# Altium PCB 3043-1-1532.PcbDoc (part 1 of 2)
Units mm, origin at the board's own origin, x right, y up, seen from the top; angles counter-clockwise.
Board outline 82.5 x 82.18 mm, 4 copper layers (Top Layer, Mid-Layer 1, Mid-Layer 2, Bottom Layer); 175 components, 111 nets, 527 pads, 268 vias.
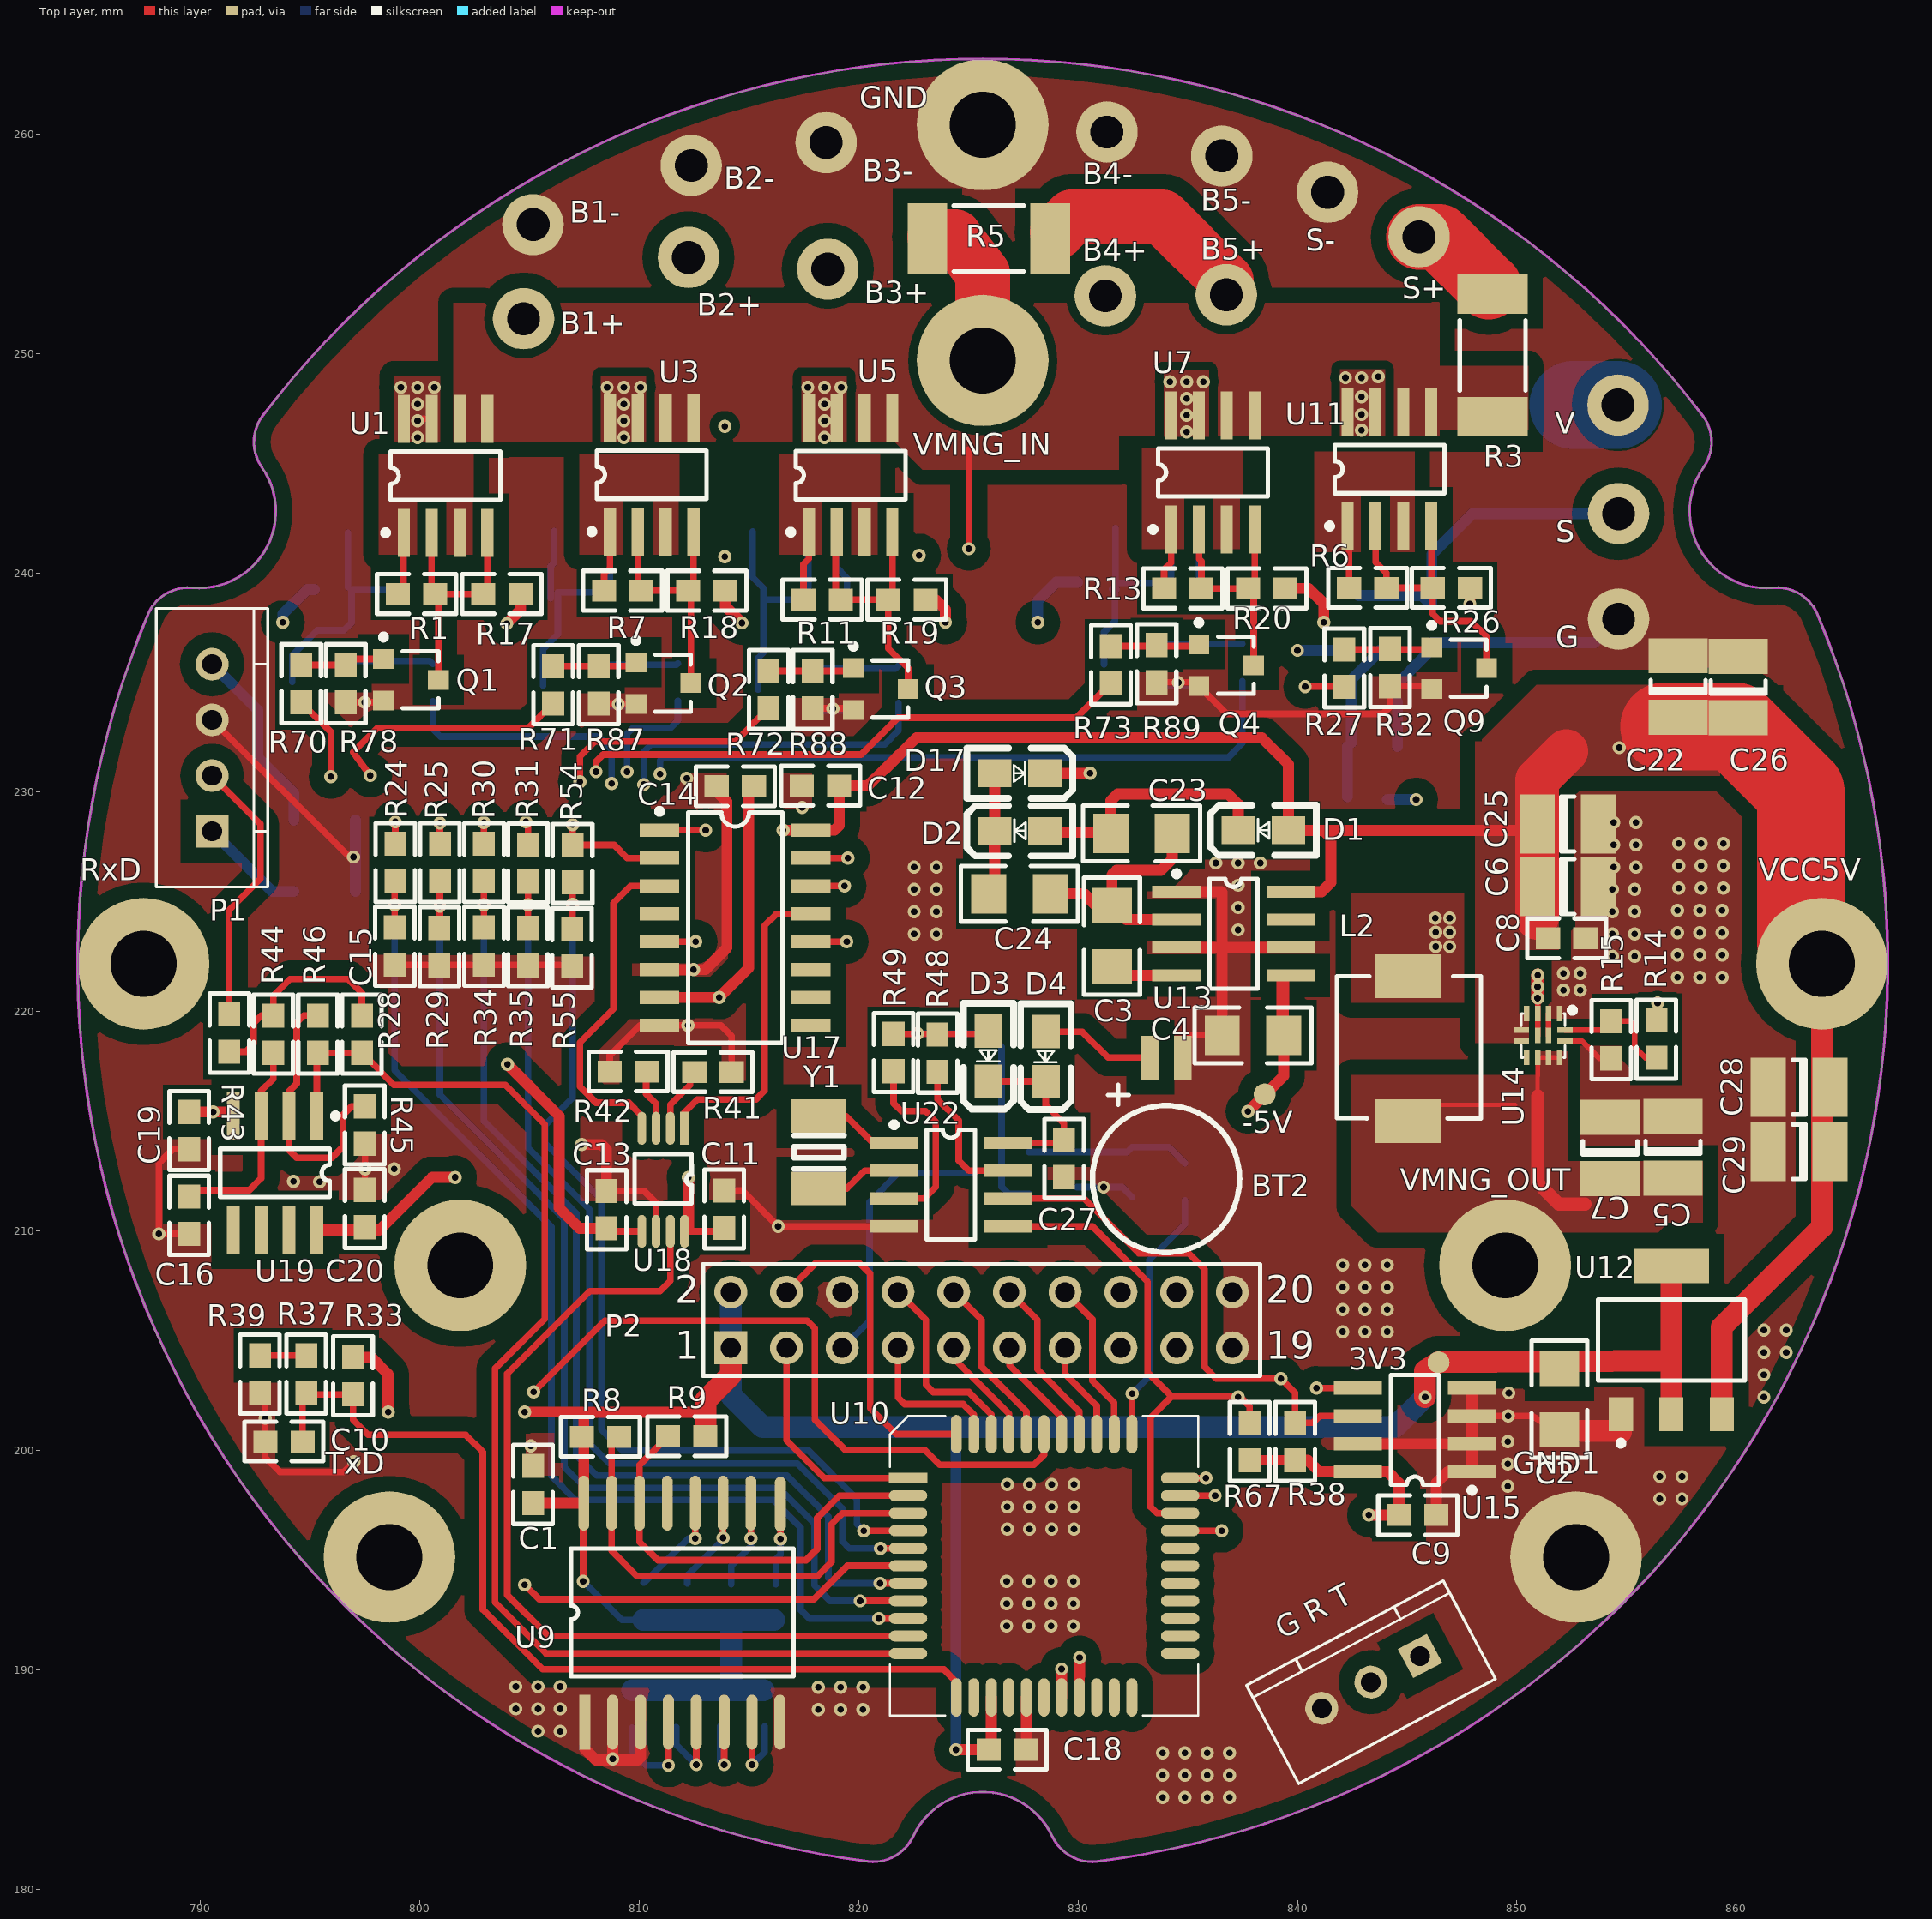
[diagram p0: Top Layer view]
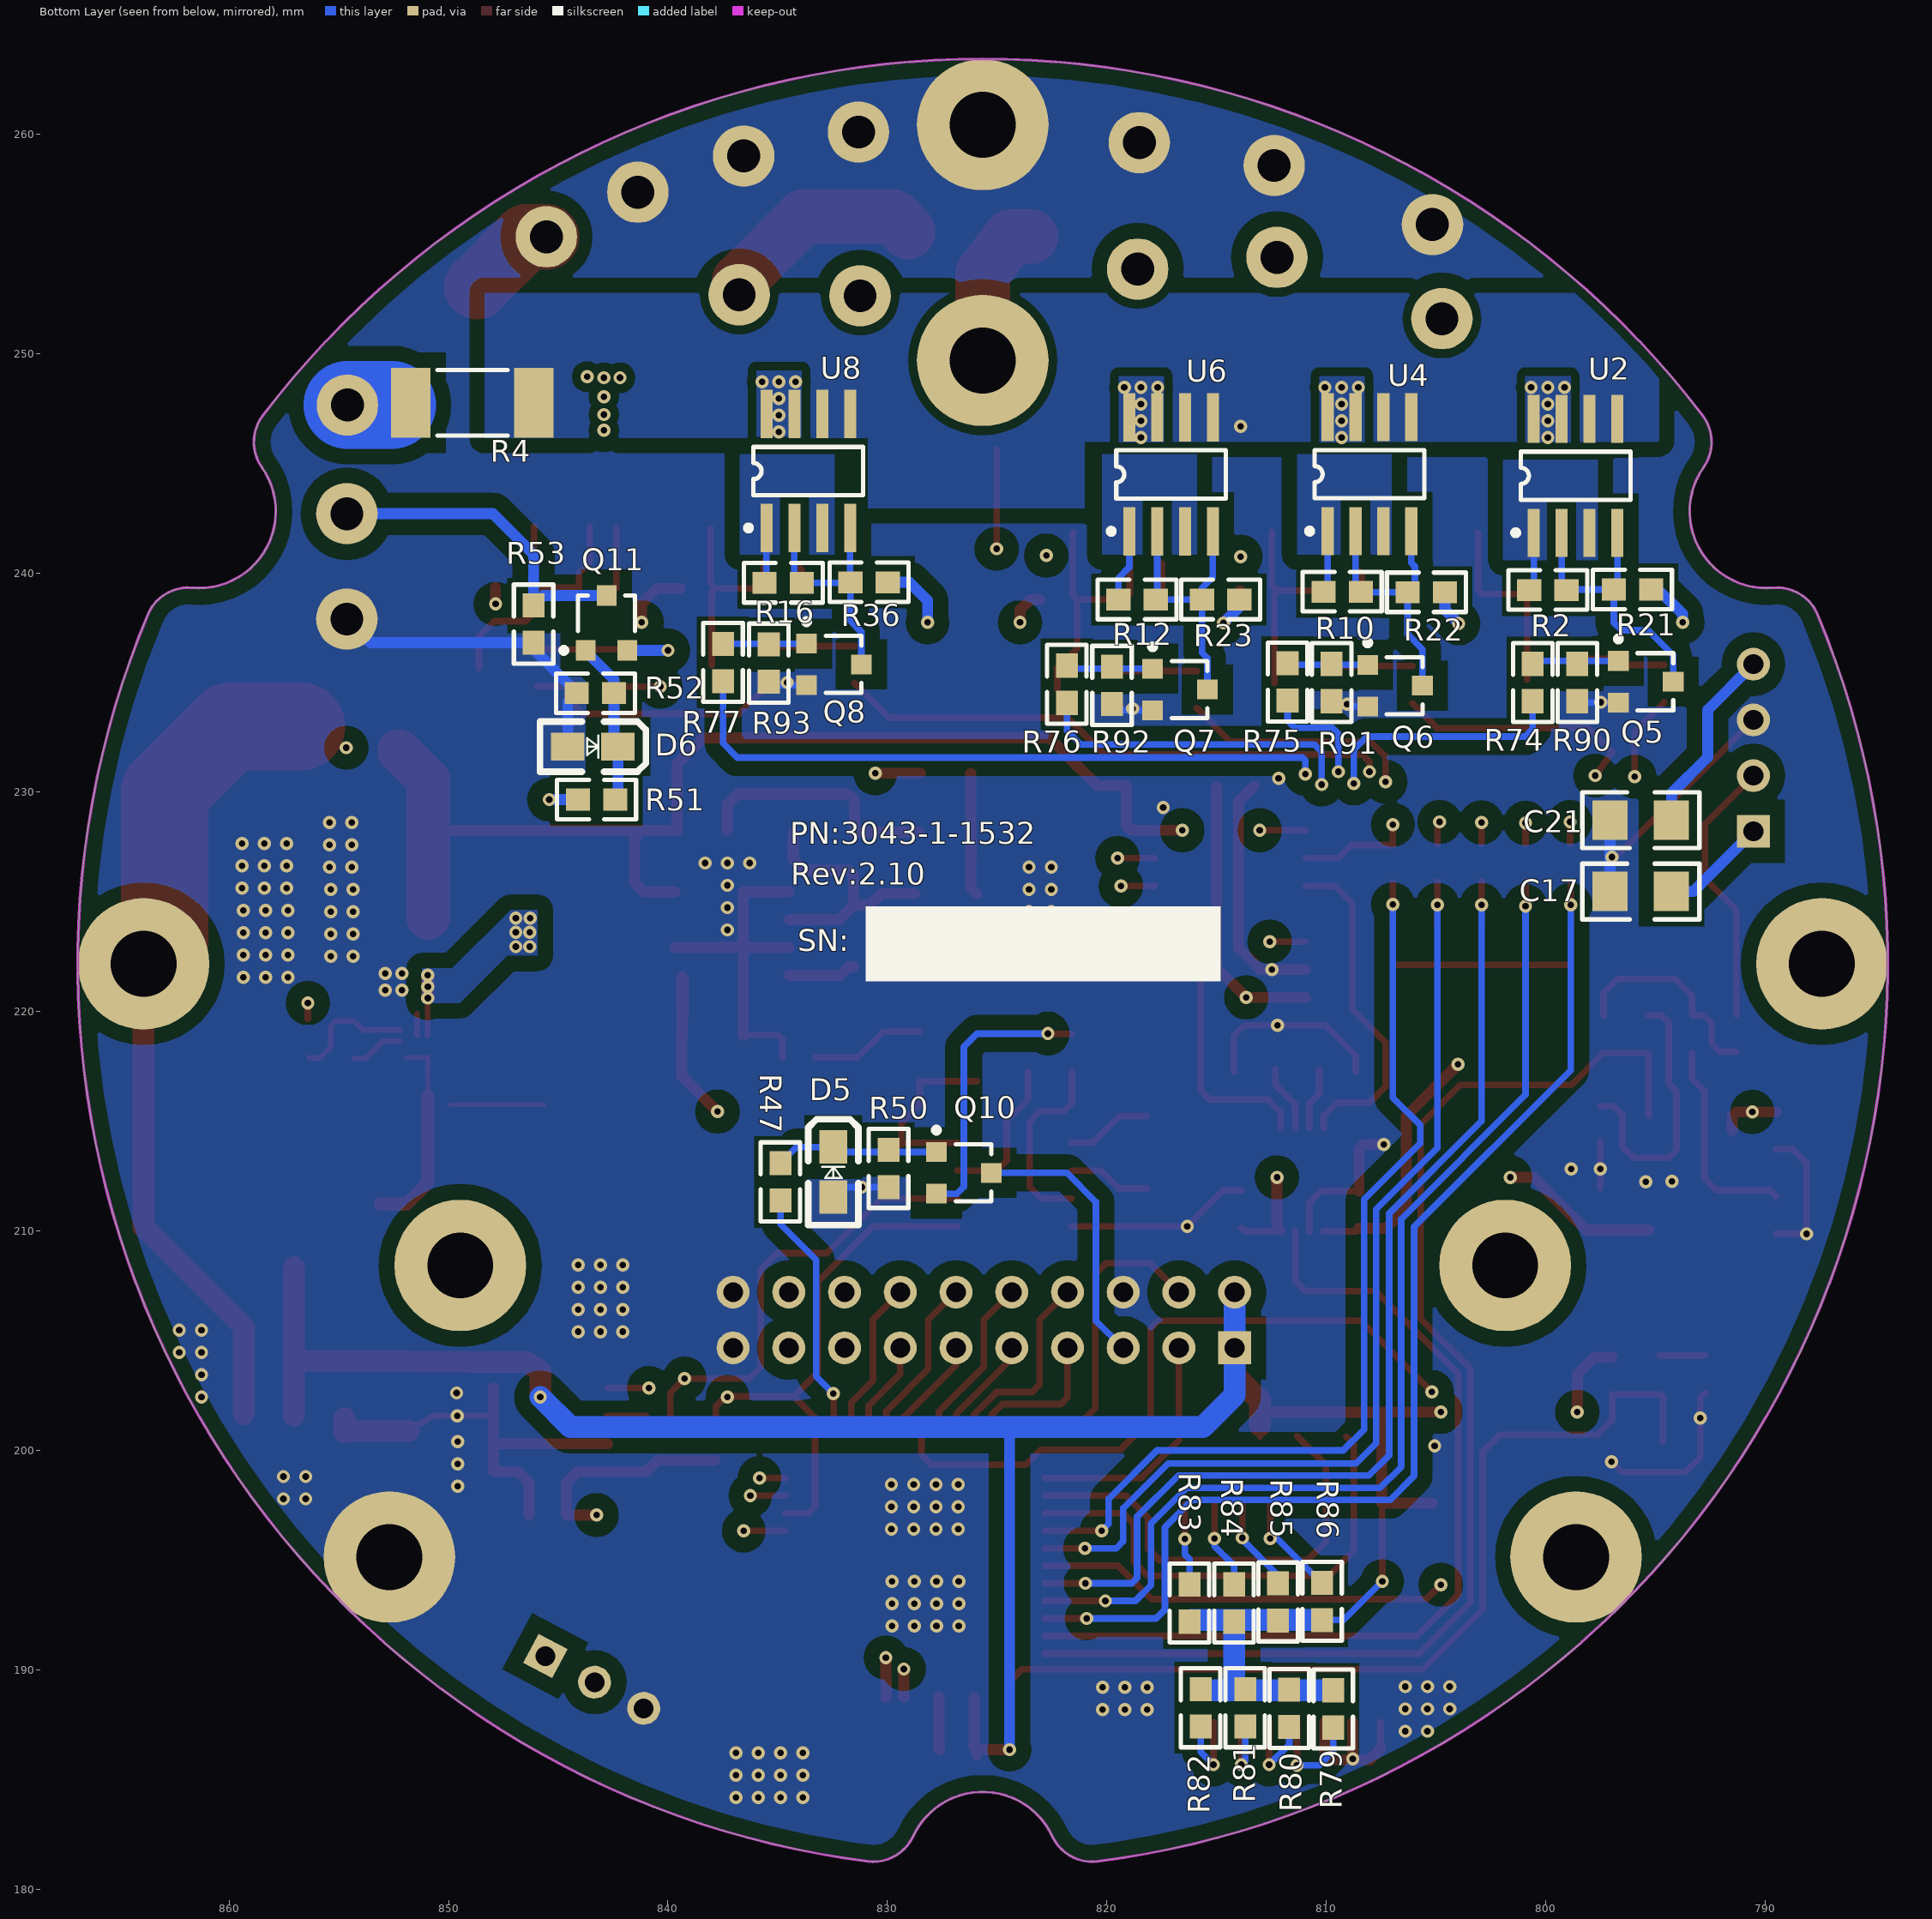
[diagram p1: Bottom Layer view, seen from below]
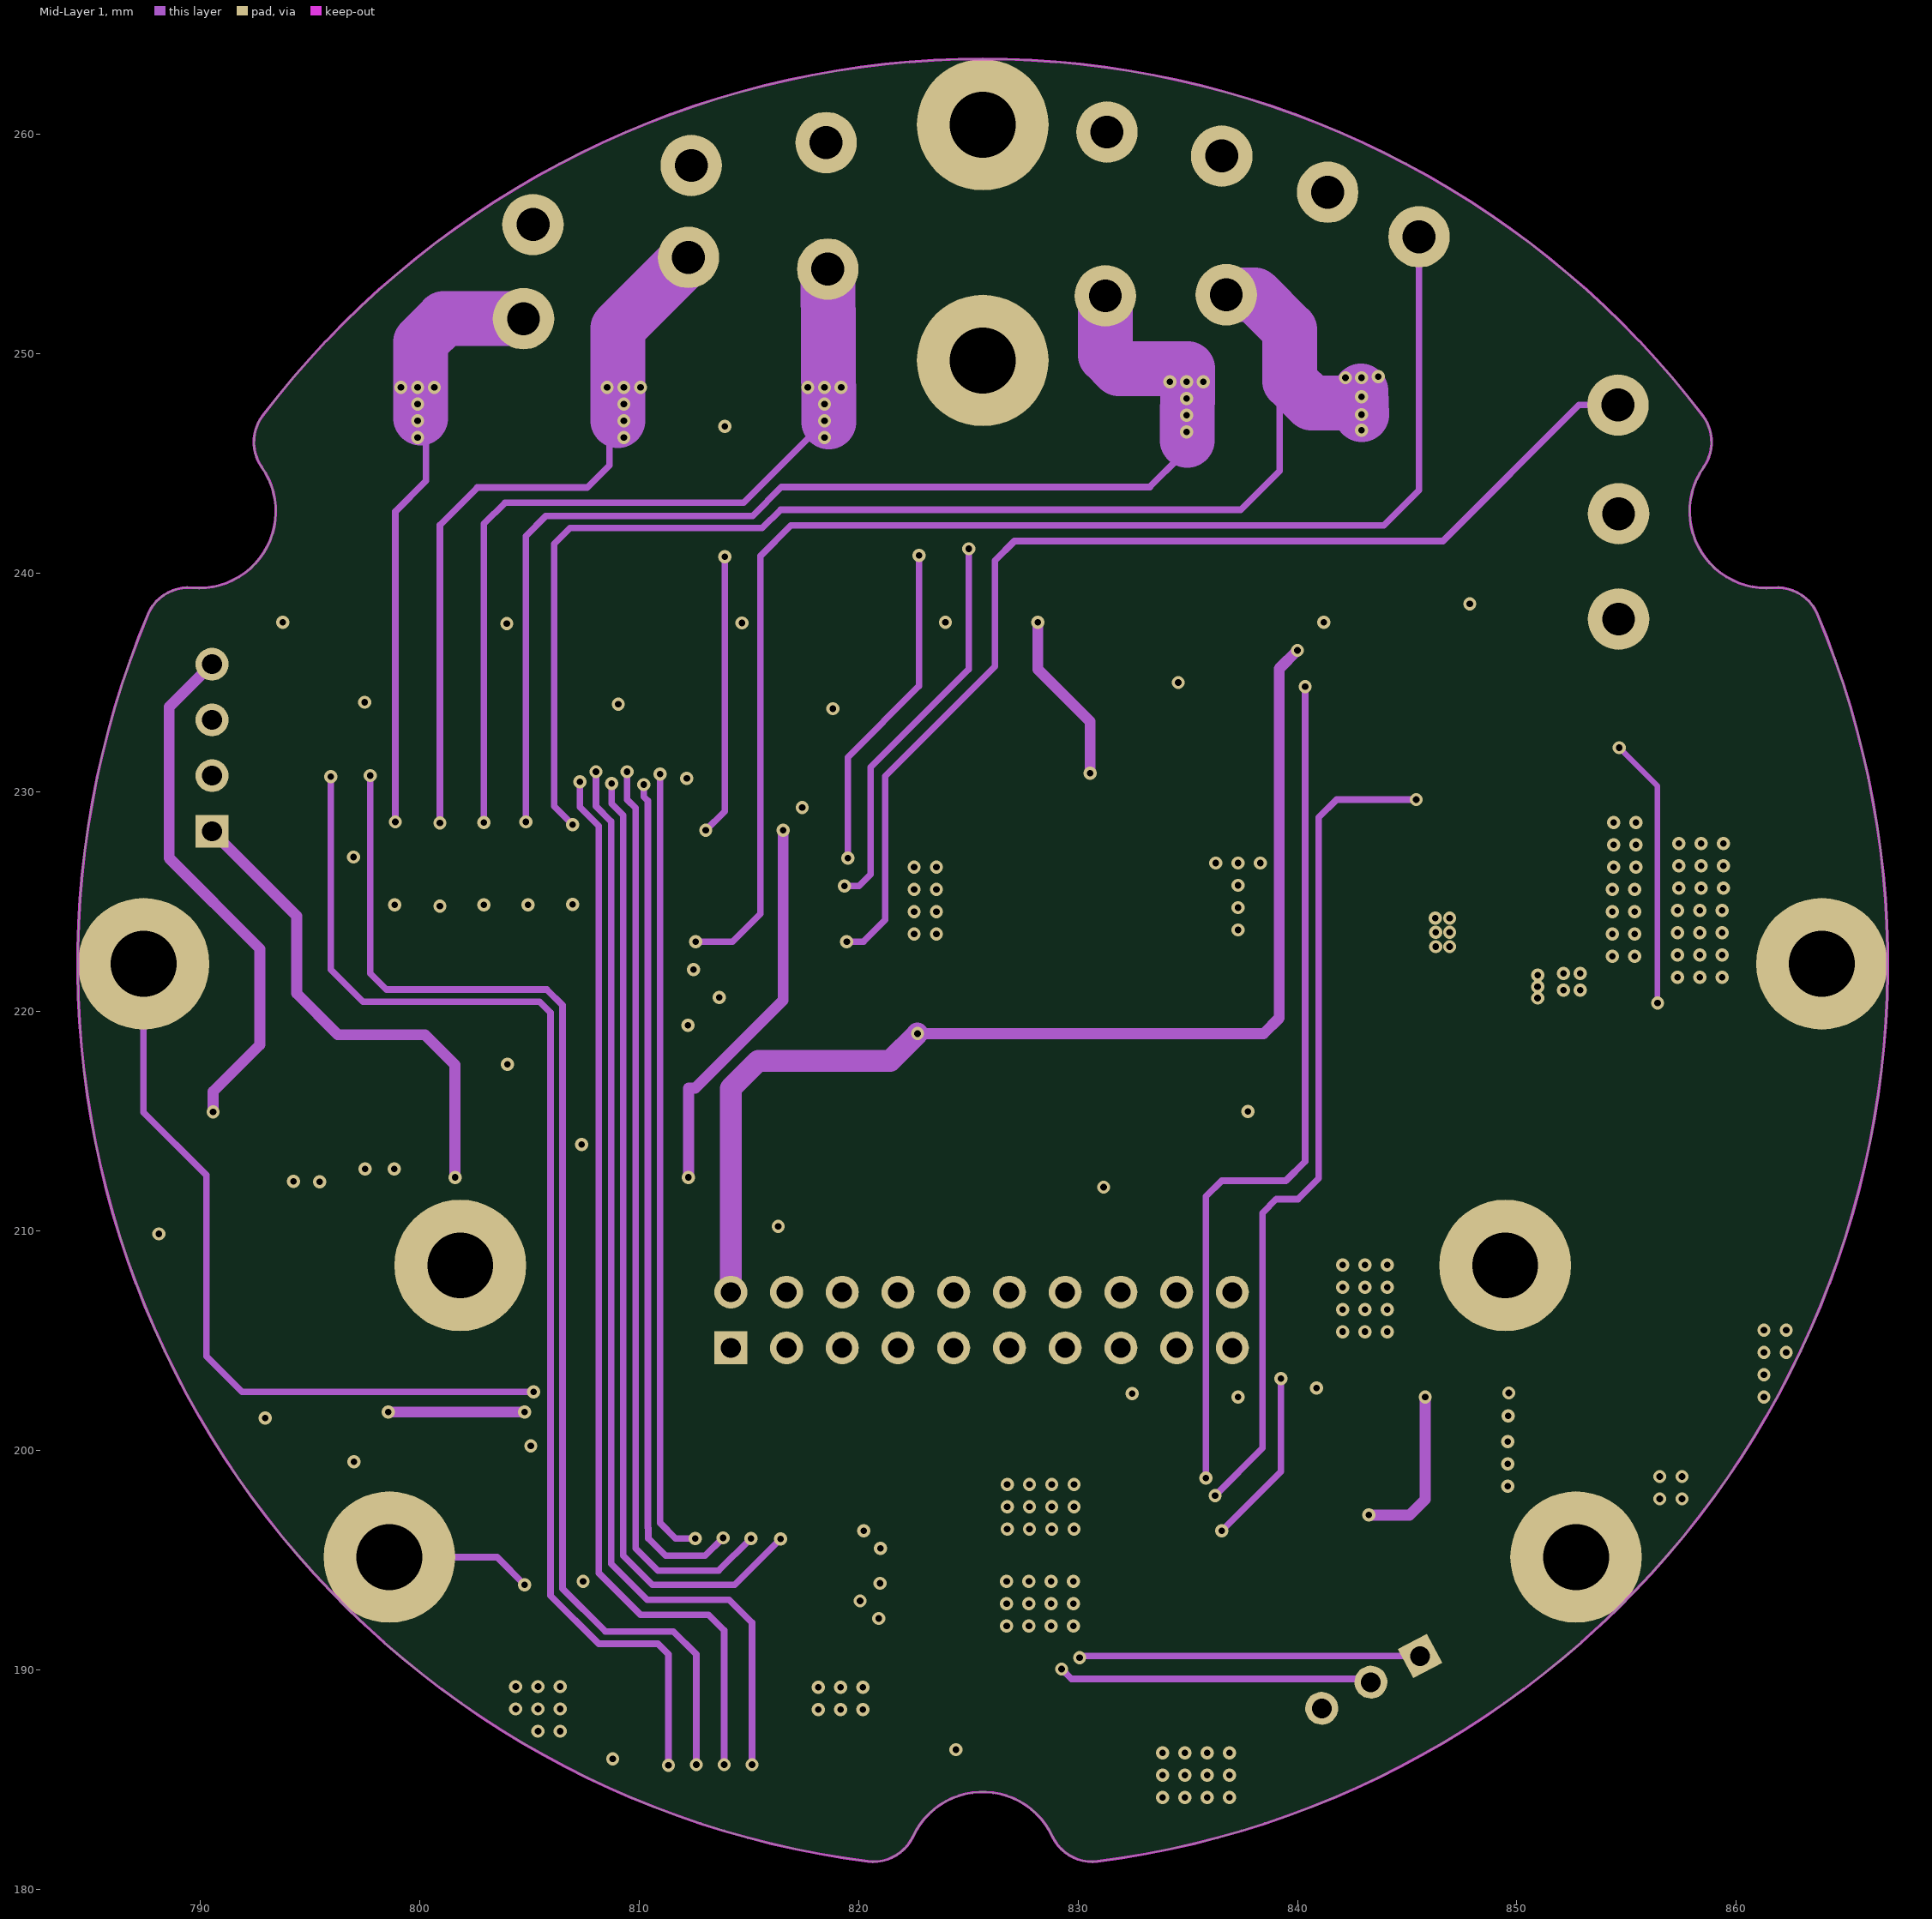
[diagram p2: Mid-Layer 1]
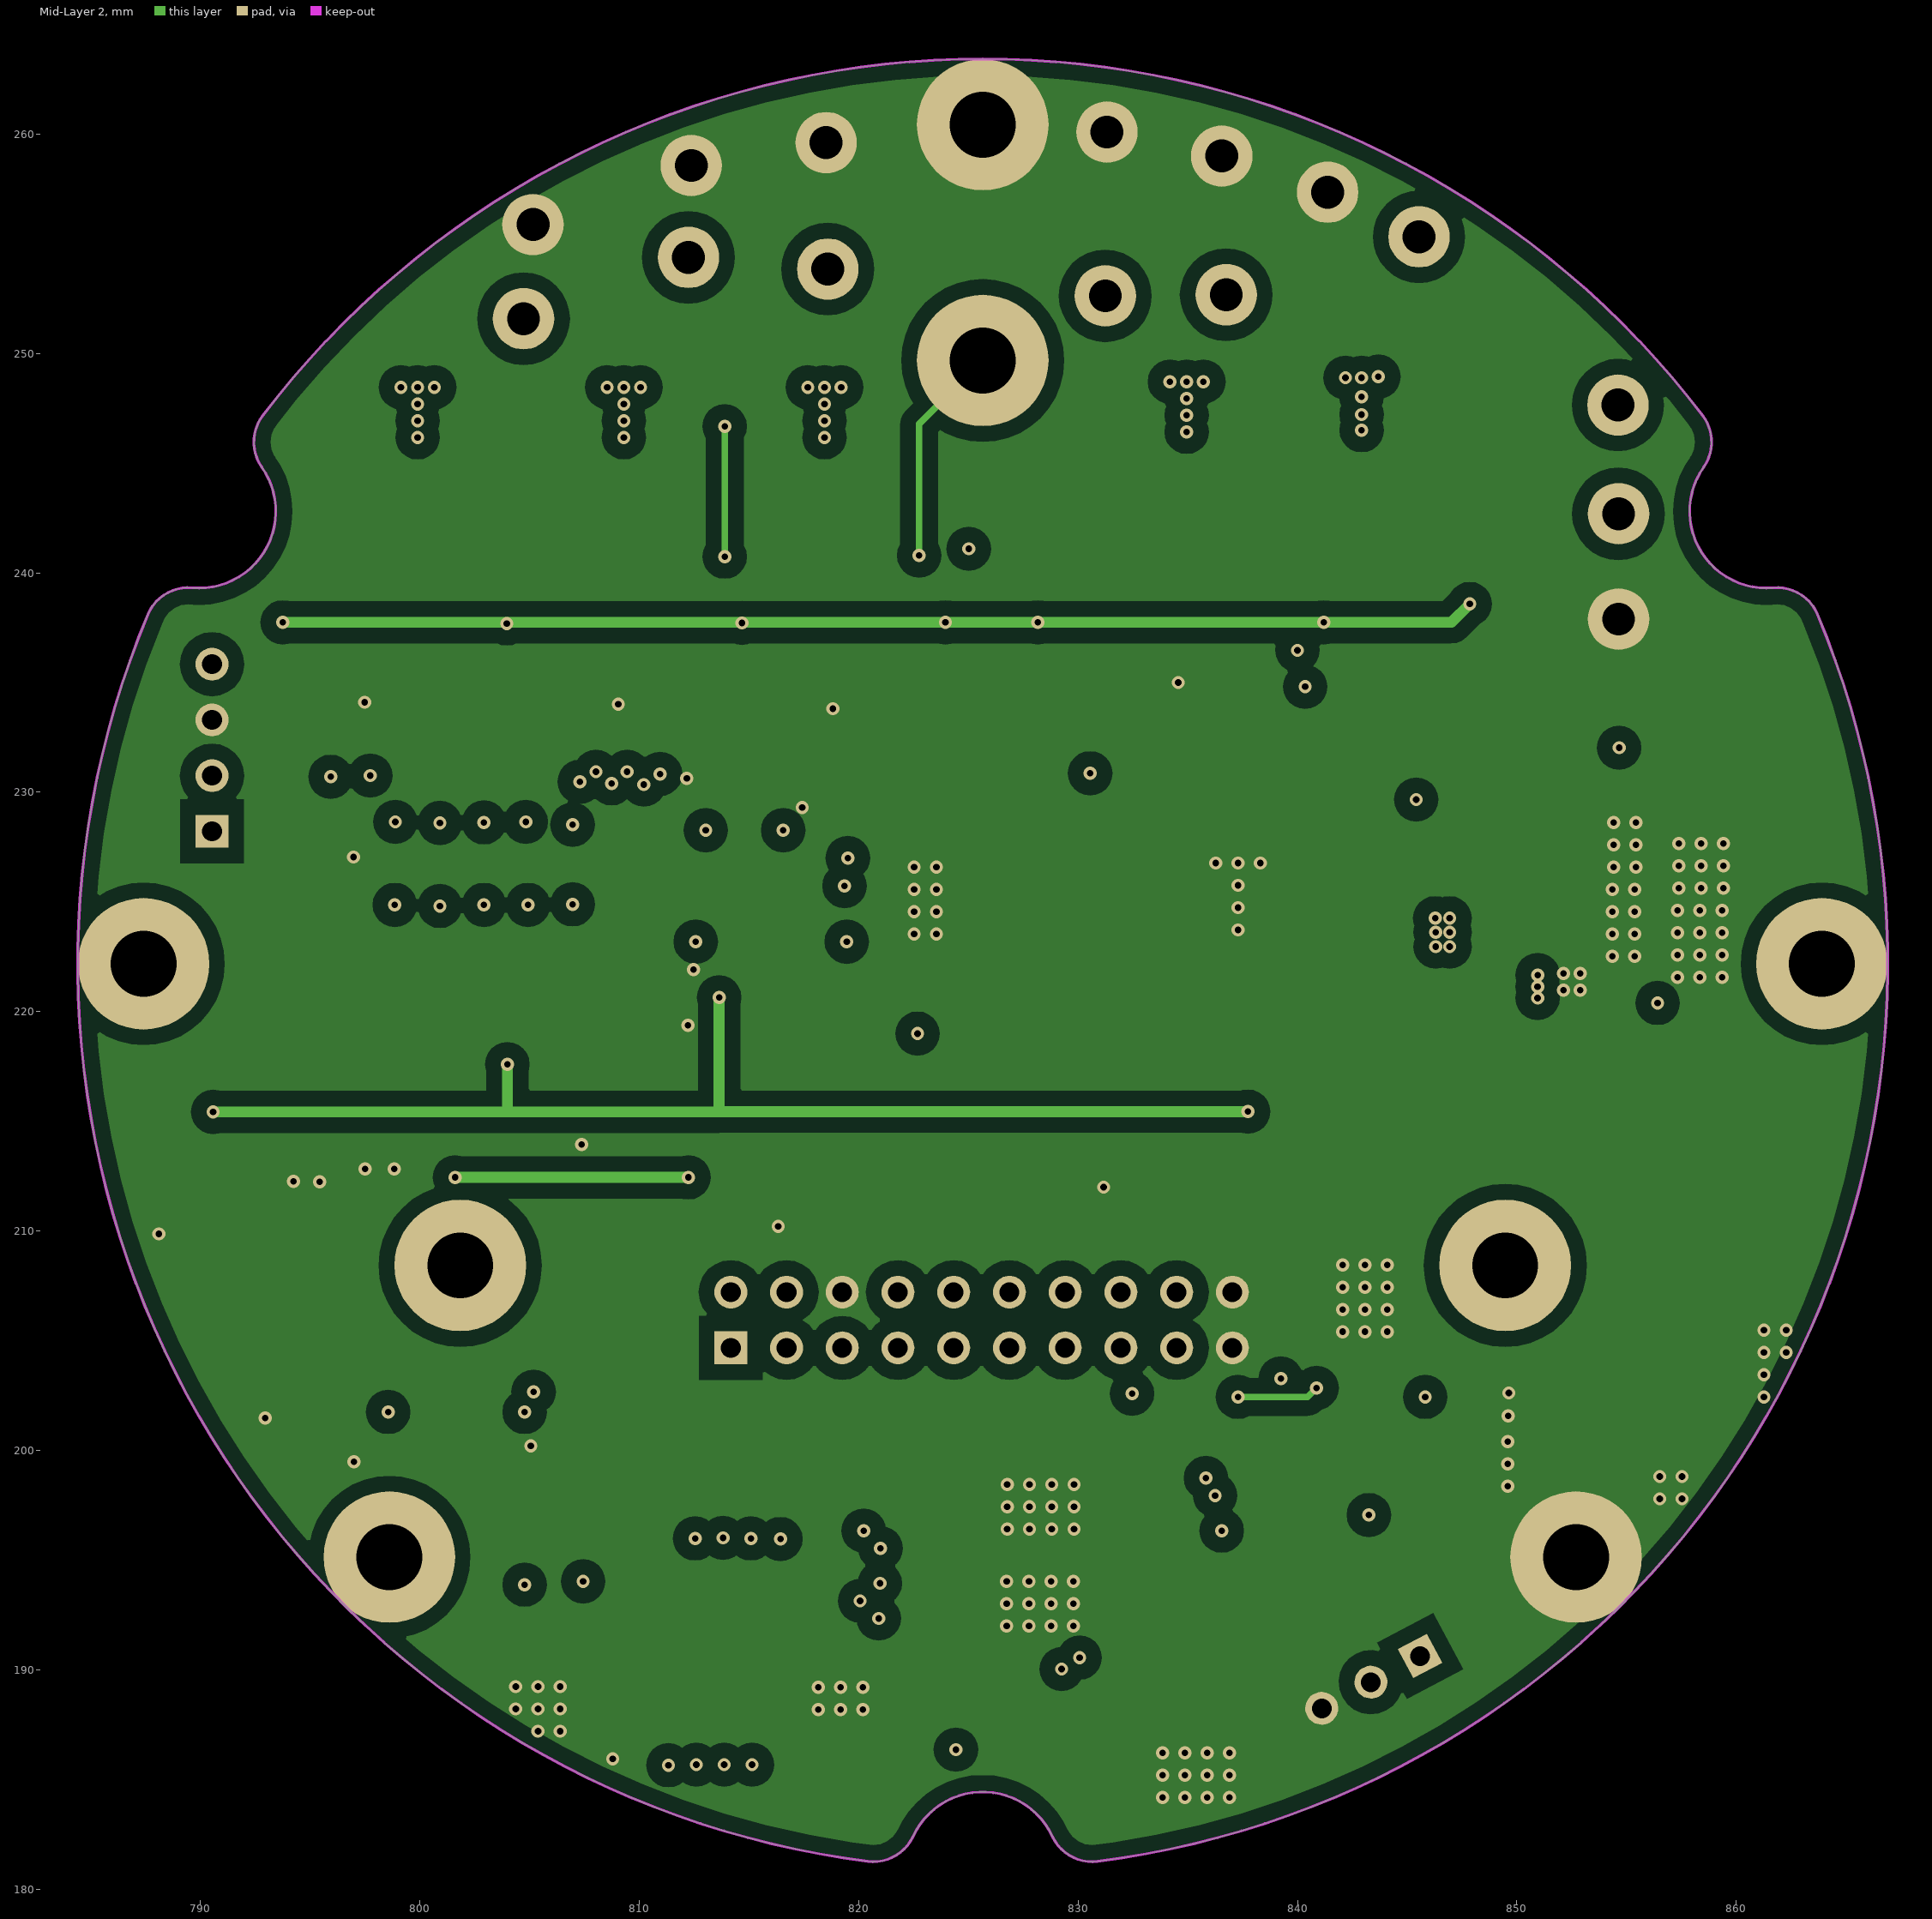
[diagram p3: Mid-Layer 2]

## Layer stack, top to bottom
Top Layer: signal copper 0.0356
Dielectric: dielectric 0.32, FR-4, Dk 4.8
Mid-Layer 1: signal copper 0.0356
Dielectric: dielectric 0.32, FR-4, Dk 4.8
Mid-Layer 2: signal copper 0.0356
Dielectric: dielectric 0.32, FR-4, Dk 4.8
Bottom Layer: signal copper 0.0356

## Board outline
787.598,238.1 cw(c789.443,237.328) 789.62,239.32 ccw(c789.93,242.806) 792.794,244.818 cw(c794.431,245.967) 792.84,247.179 cw(c825.653,222.181) 858.466,247.179 cw(c856.875,245.967) 858.512,244.818 ccw(c861.377,242.806) 861.686,239.32 cw(c861.863,237.328) 863.708,238.1 cw(c825.653,222.181) 830.895,181.266 cw(c830.641,183.25) 828.827,182.407 ccw(c825.653,180.931) 822.479,182.407 cw(c820.666,183.25) 820.411,181.266 cw(c825.653,222.181)

## Design rules (kind name [scope] priority, off if disabled: settings)
Clearance [All] p1: gap=0.25
ComponentClearance [All] p1: gap=0 collisioncheckmode=2
HoleSize [All] p1: absolutevalues=TRUE maxlimit=10 minlimit=0.025 maxpercent=80.000 minpercent=20.000
PolygonConnect [All] p1: connectstyle=Direct reliefconductorwidth=0.254 reliefentries=4 polygonreliefangle="90 Angle"
RoutingLayers [All] p1: top layer_v5=TRUE mid layer 1_v5=FALSE mid layer 2_v5=FALSE bottom layer_v5=TRUE
RoutingVias [All] p1: holewidth=0.711 width=1.27 viastyle="Through Hole" minholewidth=0.711 minwidth=1.27 maxholewidth=0.711 maxwidth=1.27
SolderMaskExpansion [All] p1: expansion=0.102
TestPointUsage [All] p1: valid=0 allowmultiple=FALSE
Testpoint [All] p1: side=15 testpointundercomponent=TRUE minsize=1.016 maxsize=2.54 preferedsize=1.524 minholesize=0 maxholesize=1.016 preferedholesize=0.813 testpointgrid=0.025 style=1023 order=1234567890
Width [All] p1: maxlimit=10 minlimit=0.1 preferedwidth=0.254 toplayer_prefwidth=0.3 midlayer1_prefwidth=0.5 midlayer2_prefwidth=0.5 bottomlayer_prefwidth=0.3 minimp=50.000000 maximp=50.000000 favimp=50.000000
15 further rules are at their usual default settings.

## Classes and differential pairs
component class U_6-E2p&RTC: BT2 C9 C27 C32 C33 C34 C35 D3 D4 DS3 L1 L3 P5 R38 R48 R49 R67 TP4 TP5 U15 U22 Y1
component class U_2-PWR_MANAGE: B1+ B1- B2+ B2- B3+ B3- B4+ B4- B5+ B5- C1 D17 Q1 Q2 Q3 Q4 Q5 Q6 Q7 Q8 Q9 R1 R2 R3 R4 R6 R7 R8 R9 R10 R11 R12 R13 R16 R17 R18 R19 R20 R21 R22 R23 R26 R27 R32 R36 R70 R71 R72 R73 R74 R75 R76 R77 R78 R79 R80 R81 R82 R83 R84 R85 R86 R87 R88 R89 R90 R91 R92 R93 S+ S- SEN U1 U2 U3 U4 U5 U6 U7 U8 U9 U11
component class U_5-PWR_ADC: C11 C12 C13 C14 C15 C16 C17 C19 C20 C21 C29 C30 C31 JP13 MARK1 MARK2 NET P1 P3 P4 PWR R24 R25 R28 R29 R30 R31 R34 R35 R41 R42 R43 R44 R45 R46 R54 R55 Ref1 U17 U18 U19 VR1 VR2
component class U_4-PWR_MANAGE_3: BT3 BT4 BT5 BT6 BT7 BT8 C10 C18 C28 CN1 CN2 CP1 CP2 CP3 CP4 CP5 CP6 CP7 CP8 D5 D6 DBG G "G R T" GND JP2 JP3 P2 Q10 Q11 R33 R37 R39 R47 R50 R51 R52 R53 RA3 RA4 RxD S S1 S2 S3 S4 S5 S6 S7 S8 TP3 TP7 TP13 TP14 TP15 TP16 TP17 TP18 TxD u7 U10 U24 U29 U30 U31 U57 U58 U59 U60 U61 U62 V VCC5V Y2
component class U_3-PWR_BAK_BATT: 3V3 5V -5V BAT C2 C3 C4 C5 C6 C7 C8 C22 C23 C24 C25 C26 C28 C29 C36 C38 D1 D2 J1 J2 J3 J4 L2 NC R5 R14 R15 R94 R95 R96 R97 R98 R99 R100 R101 R102 TP11 U12 U13 U14 U32 U63 U64 U65 U66 U67 U68 U69 VIN VMNG_IN VMNG_OUT VOUT

## Components (designator, comment, footprint, x,y, rotation, side; value= is the part's Value field where it differs from the comment)
3V3 "TP" TP_1MM 846.43,204.013 r90 top
-5V "TP" TP_1MM 838.505,216.23 r90 top (schematic designator -3V3)
B1+ "ND" END_1.5_2.8 804.723,251.587 r0 top
B1- "ND" END_1.5_2.8 805.155,255.88 r0 top
B2+ "ND" END_1.5_2.8 812.241,254.381 r0 top
B2- "ND" END_1.5_2.8 812.368,258.572 r0 top
B3+ "ND" END_1.5_2.8 818.591,253.848 r0 top
B3- "ND" END_1.5_2.8 818.515,259.613 r0 top
B4+ "ND" END_1.5_2.8 831.24,252.628 r0 top
B4- "ND" END_1.5_2.8 831.317,260.096 r0 top
B5+ "ND" END_1.5_2.8 836.752,252.679 r0 top
B5- "ND" END_1.5_2.8 836.549,259.004 r0 top
BT2 "MS621FE" BATT_BAK 833.958,211.76 r90 top
C1 "100nF_20%_0603" C1608-0603 805.155,198.45 r90 top
C2 "10uF_20%_1206" CC3216-1206 851.941,201.193 r270 top
C3 "10uF_20%_1206" CC3216-1206 831.545,224.587 r90 top
C4 "10uF_20%_1206" CC3216-1206 836.828,218.923 r180 top
C5 "22uF_20%_1210" CC3225-1210 857.123,213.817 r90 top
C6 "10uF_20%_1210" CC3225-1210 852.322,225.695 r0 top
C7 "22uF_20%_1210" CC3225-1210 854.253,213.792 r90 top
C8 "1uF_20%_0603" C1608-0603 852.272,223.342 r0 top
C9 "100nF_20%_0603" C1608-0603 845.48,197.053 r0 top
C10 "100nF_20%_0603" C1608-0603 793.801,200.406 r180 top
C11 "Cap2" C1608-0603 813.867,210.998 r90 top
C12 "100nF_20%_0603" C1608-0603 818.261,230.302 r180 top
C13 "Cap2" C1608-0603 808.507,210.972 r90 top
C14 "100nF_20%_0603" C1608-0603 814.375,230.276 r180 top
C15 "39nF_20%_0603" C1608-0603 797.357,218.973 r270 top
C16 "39nF_20%_0603" C1608-0603 789.483,210.718 r270 top
C17 "10uF_20%_1210" CC3216-1206 796.798,225.476 r0 bottom
C18 "100nF_20%_0603" C1608-0603 826.77,186.36 r0 top
C19 "100nF_20%_0603" C1608-0603 789.483,214.579 r270 top
C20 "100nF_20%_0603" C1608-0603 797.484,211.023 r90 top
C21 "10uF_20%_1210" CC3216-1206 796.798,228.727 r0 bottom
C22 "10uF_20%_1210" CC3225-1210 857.352,234.823 r90 top
C23 "10uF_20%_1206" CC3216-1206 834.034,228.117 r0 top
C24 "10uF_20%_1206" CC3216-1206 828.472,225.374 r0 top
C25 "10uF_20%_1210" CC3225-1210 852.322,228.549 r0 top
C26 "10uF_20%_1210" CC3225-1210 860.095,234.798 r90 top
C27 "Cap2" C1608-0603 829.361,213.309 r270 top
C28 "10uF_20%_1210" CC3225-1210 862.863,216.56 r180 top
C29 "10uF_20%_1210" CC3225-1210 862.863,213.614 r180 top
D1 "1N4148" LED0805 838.327,228.27 r0 top
D2 "1N4148" LED0805 827.227,228.244 r0 top
D3 "1N4148" LED0805 825.906,217.856 r90 top
D4 "1N4148" LED0805 828.523,217.83 r90 top
D5 "5.1V" LED0805 832.46,212.801 r270 bottom
D6 "5.1V" LED0805 843.305,232.08 r0 bottom
D17 "SS34_SOD323" LED0805 827.456,230.861 r180 top
G "ND" END_1.5_2.8 854.634,237.896 r90 top
"G R T" "Header 3" XH-03H 845.591,190.627 r208 top (schematic designator "T R G")
GND "ND" END_3_6#1 825.653,261.874 r0 top
GND1 "ND" END_3_6#2 852.7,180.467 r0 top (schematic designator GND)
L2 "Inductor" L6x6x3_3A 846.328,217.551 r90 top
P1 "Header 4" XH-04H 790.524,228.219 r90 top
P2 "Header 10X2" HDR2X10 814.172,204.673 r0 top locked
Q1 "MOSFET-N" SO-G3/C2.5 800.506,235.077 r270 top
Q2 "MOSFET-N" SO-G3/C2.5 812.013,234.925 r270 top
Q3 "MOSFET-N" SO-G3/C2.5 821.919,234.657 r270 top
Q4 "MOSFET-N" SO-G3/C2.5 837.667,235.737 r270 top
Q5 "MOSFET-N" SO-G3/C2.5 794.512,234.988 r270 bottom
Q6 "MOSFET-N" SO-G3/C2.5 805.942,234.81 r270 bottom
Q7 "MOSFET-N" SO-G3/C2.5 815.746,234.633 r270 bottom
Q8 "MOSFET-N" SO-G3/C2.5 831.52,235.776 r270 bottom
Q9 "MOSFET-N" SO-G3/C2.5 848.284,235.61 r270 top
Q10 "MOSFET-P_SI3401_2301" SO-G3/C2.5 825.602,212.598 r270 bottom
Q11 "MOSFET-P_SI3401_2301" SO-G3/C2.5 842.747,238.633 r180 bottom
R1 "4.7K_1%_0603" C1608-0603 799.846,239.039 r0 top
R2 "4.7K_1%_0603" C1608-0603 799.897,239.217 r0 bottom
R3 "25mR_1%_3225" CR6332-2512 848.893,249.911 r270 top
R4 "25mR_1%_3225" CR6332-2512 848.919,247.752 r180 bottom
R5 "25mR_1%_3225" CR6332-2512 825.932,255.245 r180 top
R6 "4.7K_1%_0603" C1608-0603 843.204,239.319 r180 top
R7 "4.7K_1%_0603" C1608-0603 809.244,239.192 r180 top
R8 "4.7K_5%_0603" C1608-0603 808.228,200.619 r0 top
R9 "4.7K_5%_0603" C1608-0603 812.165,200.644 r180 top
R10 "4.7K_1%_0603" C1608-0603 809.269,239.141 r0 bottom
R11 "4.7K_1%_0603" C1608-0603 818.337,238.785 r180 top
R12 "4.7K_1%_0603" C1608-0603 818.617,238.785 r0 bottom
R13 "4.7K_1%_0603" C1608-0603 834.771,239.293 r180 top
R14 "681K_1%_0603" C1608-0603 856.361,218.745 r270 top
R15 "130K_1%_0603" C1608-0603 854.304,218.719 r270 top
R16 "4.7K_1%_0603" C1608-0603 834.746,239.547 r0 bottom
R17 "4.7K_1%_0603" C1608-0603 803.732,239.039 r0 top
R18 "4.7K_1%_0603" C1608-0603 813.079,239.192 r0 top
R19 "4.7K_1%_0603" C1608-0603 822.198,238.785 r0 top
R20 "4.7K_1%_0603" C1608-0603 838.606,239.293 r0 top
R21 "4.7K_1%_0603" C1608-0603 796.036,239.243 r180 bottom
R22 "4.7K_1%_0603" C1608-0603 805.434,239.116 r180 bottom
R23 "4.7K_1%_0603" C1608-0603 814.807,238.785 r180 bottom
R24 "10K_5%_0603" C1608-0603 798.881,226.797 r90 top
R25 "10K_5%_0603" C1608-0603 800.913,226.797 r90 top
R26 "4.7K_1%_0603" C1608-0603 847.014,239.319 r0 top
R27 "4.7K_1%_0603" C1608-0603 842.137,235.661 r270 top
R28 "10K_5%_0603" C1608-0603 798.855,222.987 r90 top
R29 "10K_5%_0603" C1608-0603 800.887,222.961 r90 top
R30 "10K_5%_0603" C1608-0603 802.919,226.797 r90 top
R31 "10K_5%_0603" C1608-0603 804.926,226.771 r90 top
R32 "4.7K_1%_0603" C1608-0603 844.22,235.687 r270 top
R33 "10K_5%_0603" C1608-0603 796.95,203.403 r90 top
R34 "10K_5%_0603" C1608-0603 802.919,222.987 r90 top
R35 "10K_5%_0603" C1608-0603 804.926,222.961 r90 top
R36 "4.7K_1%_0603" C1608-0603 830.834,239.573 r180 bottom
R37 "1K_5%_0603" C1608-0603 794.817,203.479 r270 top
R38 "4.7K_5%_0603" C1608-0603 839.892,200.406 r270 top
R39 "1K_5%_0603" C1608-0603 792.709,203.479 r270 top
R41 "1K_5%_0603" C1608-0603 813.359,217.246 r0 top
R42 "1K_5%_0603" C1608-0603 809.498,217.272 r0 top
R43 "1K_5%_0603" C1608-0603 791.312,219.024 r270 top
R44 "1K_5%_0603" C1608-0603 793.318,218.973 r270 top
R45 "1K_5%_0603" C1608-0603 797.484,214.833 r90 top
R46 "1K_5%_0603" C1608-0603 795.35,218.973 r270 top
R47 "10K_5%_0603" C1608-0603 834.873,212.242 r90 bottom
R48 "4.7K_5%_0603" C1608-0603 823.595,218.11 r270 top
R49 "4.7K_5%_0603" C1608-0603 821.588,218.135 r270 top
R50 "4.7K_1%_0603" C1608-0603 829.945,212.852 r90 bottom
R51 "10K_5%_0603" C1608-0603 843.255,229.667 r0 bottom
R52 "4.7K_1%_0603" C1608-0603 843.305,234.518 r180 bottom
R53 "10K_5%_0603" C1608-0603 846.125,237.668 r270 bottom
R54 "10K_5%_0603" C1608-0603 806.958,226.746 r90 top
R55 "10K_5%_0603" C1608-0603 806.933,222.91 r90 top
R67 "4.7K_5%_0603" C1608-0603 837.819,200.406 r270 top
R70 "4.7K_1%_0603" C1608-0603 794.588,234.95 r270 top
R71 "4.7K_1%_0603" C1608-0603 806.069,234.899 r270 top
R72 "4.7K_1%_0603" C1608-0603 815.899,234.682 r270 top
R73 "4.7K_1%_0603" C1608-0603 831.494,235.814 r270 top
R74 "4.7K_1%_0603" C1608-0603 800.583,235.001 r270 bottom
R75 "4.7K_1%_0603" C1608-0603 811.759,235.026 r270 bottom
R76 "4.7K_1%_0603" C1608-0603 821.817,234.925 r270 bottom
R77 "4.7K_1%_0603" C1608-0603 837.489,235.915 r270 bottom
R78 "4.7K_1%_0603" C1608-0603 796.62,234.95 r270 top
R79 "10K_5%_0603" C1608-0603 809.676,188.214 r90 bottom
R80 "10K_5%_0603" C1608-0603 811.682,188.239 r90 bottom
R81 "10K_5%_0603" C1608-0603 813.689,188.265 r90 bottom
R82 "10K_5%_0603" C1608-0603 815.721,188.265 r90 bottom
R83 "10K_5%_0603" C1608-0603 816.229,193.04 r270 bottom
R84 "10K_5%_0603" C1608-0603 814.197,193.04 r270 bottom
R85 "10K_5%_0603" C1608-0603 812.19,193.091 r270 bottom
R86 "10K_5%_0603" C1608-0603 810.184,193.116 r270 bottom
R87 "4.7K_1%_0603" C1608-0603 808.152,234.899 r270 top
R88 "4.7K_1%_0603" C1608-0603 817.905,234.682 r270 top
R89 "4.7K_1%_0603" C1608-0603 833.577,235.864 r270 top
R90 "4.7K_1%_0603" C1608-0603 798.551,235.001 r270 bottom
R91 "4.7K_1%_0603" C1608-0603 809.752,235.001 r270 bottom
R92 "4.7K_1%_0603" C1608-0603 819.76,234.874 r270 bottom
R93 "4.7K_1%_0603" C1608-0603 835.406,235.89 r270 bottom
RxD "ND" END_3_6#3 788.06,224.282 r0 top
S "ND" END_1.5_2.8 854.634,242.697 r90 top
S+ "ND" END_1.5_2.8 845.541,255.321 r0 top
S- "ND" END_1.5_2.8 841.375,257.353 r0 top
TxD "ND" END_3_6#4 798.449,194.564 r0 top
U1 "SI4953DY" SO-8 801.167,244.424 r0 top
U2 "SI4953DY" SO-8 798.627,244.424 r180 bottom
U3 "SI4953DY" SO-8 810.565,244.475 r0 top
U4 "SI4953DY" SO-8 808.025,244.5 r180 bottom
U5 "SI4953DY" SO-8 819.633,244.45 r0 top
U6 "SI4953DY" SO-8 817.067,244.491 r180 bottom
U7 "SI4953DY" SO-8 836.143,244.577 r0 top
U8 "SI4953DY" SO-8 833.603,244.643 r180 bottom
U9 "PCF8574T" SOP16_P1.27_B10 810.006,190.103 r90 top
U10 "STC15F2K60S2_QFP44" PQFP44 822.249,198.739 r0 top
U11 "SI4953DY" SO-8 844.194,244.729 r0 top
U12 "REG1117-3.3" SOT223 856.158,204.394 r0 top
U13 "TP7660" SO-8 837.082,223.555 r270 top
U14 "MP3422GG" QFN-14 852.195,219.913 r270 top
U15 "24LC128" 8s1 845.353,200.939 r90 top
U17 "MC14052BF" 966-01 814.375,223.825 r270 top
U18 "AD8221" MSOP8 812.063,214.681 r270 top
U19 "LM358D" 751-02 793.394,212.649 r180 top
U22 "DS1337S" SO-8 824.205,212.115 r270 top
V "ND" END_1.5_2.8 854.608,247.65 r90 top
VCC5V "ND" END_3_6#5 860.374,219.989 r0 top
VMNG_IN "ND" END_3_6#6 825.144,249.58 r0 top
VMNG_OUT "ND" END_3_6#7 852.322,210.795 r90 top locked
Y1 "32.768kHz_SMD" XTAL-3216 818.185,211.938 r90 top

## Footprints (in the part's own frame and the unit in brackets; to place one, negate y for a bottom-side part, rotate by r counter-clockwise, add the part's x,y. Pads: shape width x height; smd on the part's side, far side on the other; paste and mask are expansions set on the pad)
8s1 [mm] "Small Outline; 8 Leads; Body Width 3.9 mm; Pitch 1.27 mm"
  rect 0.6x2.2 smd: 1(-1.905,-2.6) 2(-0.635,-2.6) 3(0.635,-2.6) 4(1.905,-2.6) 5(1.905,2.6) 6(0.635,2.6) 7(-0.635,2.6) 8(-1.905,2.6)
  silkscreen extent -2.88,-2.72 2.5,1.1
751-02 [mm] "Small Outline; 8 Leads; Body Width 3.9 mm; Pitch 1.27 mm"
  rect 0.6x2.2 smd: 1(-1.905,-2.6) 2(-0.635,-2.6) 3(0.635,-2.6) 4(1.905,-2.6) 5(1.905,2.6) 6(0.635,2.6) 7(-0.635,2.6) 8(-1.905,2.6)
  silkscreen extent -2.88,-2.72 2.5,1.1
966-01 [mm] "Small Outline; 16 Leads; Body Width 5.3 mm; Pitch 1.27 mm"
  rect 0.6x1.8 smd: 1(-4.445,-3.45) 2(-3.175,-3.45) 3(-1.905,-3.45) 4(-0.635,-3.45) 5(0.635,-3.45) 6(1.905,-3.45) 7(3.175,-3.45) 8(4.445,-3.45) 9(4.445,3.45) 10(3.175,3.45) 11(1.905,3.45) 12(0.635,3.45) 13(-0.635,3.45) 14(-1.905,3.45) 15(-3.175,3.45) 16(-4.445,3.45)
  silkscreen extent -5.43,-3.57 5.25,2.15
BATT_BAK [mm]
  rect 2x0.8 smd: 1(6.147,0.668) 2(6.147,-0.821)
  silkscreen extent -2.74,-3.4 4.9,3.3
C1608-0603 [mm] "Chip Resistor; Body 1.6 x 0.8 mm (LxW typ)"
  rect 1.1x1 smd: 1(-0.85,0) 2(0.85,0)
  silkscreen extent -1.8,-0.9 1.8,0.9
CC3216-1206 [mm]
  rect 1.6x1.8 smd: 1(-2.54,0) 2(0.26,0)
  silkscreen extent -3.81,-1.27 1.52,1.27
CC3225-1210 [mm] "Chip Capacitor; Body 3.2 x 2.5 mm (LxW typ)"
  rect 1.6x2.7 smd: 1(-1.4,0) 2(1.4,0)
  silkscreen extent -0.3,-1.25 0.3,1.25
CR6332-2512 [mm] "Chip Resistor; Body 6.3 x 3.2 mm (LxW typ)"
  rect 1.8x3.2 smd: 1(-2.8,0) 2(2.8,0)
  silkscreen extent -1.6,-1.5 1.6,1.5
END_1.5_2.8 [mm]
  round 2.8 hole 1.5: 1(0,0)
END_3_6#1 [mm]
  round 6 hole 3: 1(0,-1.443)
END_3_6#2 [mm]
  round 6 hole 3: 1(0,14.668)
END_3_6#3 [mm]
  round 6 hole 3: 1(-0.657,-2.101)
END_3_6#4 [mm]
  round 6 hole 3: 1(0.157,0.571)
END_3_6#5 [mm]
  round 6 hole 3: 1(3.529,2.192)
END_3_6#6 [mm]
  round 6 hole 3: 1(0.509,0.101)
END_3_6#7 [mm]
  round 6 hole 3: 1(-2.363,2.854)
HDR2X10 [mm] "Connector; Header; 10x2 Position"
  rect 1.5x1.5 hole 0.9: 1(0,0)
  round 1.5 hole 0.9: 2(0,2.54) 3(2.54,0) 4(2.54,2.54) 5(5.08,0) 6(5.08,2.54) 7(7.62,0) 8(7.62,2.54) 9(10.16,0) 10(10.16,2.54) 11(12.7,0) 12(12.7,2.54) 13(15.24,0) 14(15.24,2.54) 15(17.78,0) 16(17.78,2.54) 17(20.32,0) 18(20.32,2.54) 19(22.86,0) 20(22.86,2.54)
  silkscreen extent -1.27,-1.27 24.13,3.81
L6x6x3_3A [mm]
  rect 2x3 smd: 1(-2.54,1.27) 2(4.064,1.27)
  silkscreen extent -2.41,-2.03 4.06,4.53
LED0805 [mil]
  rect 60x50 smd: 1(49.55,-0.2) 2(-40.45,-0.2)
  silkscreen extent -90,-45 100,45
MSOP8 [mm]
  rect 1.5x0.4 smd: 1(0,0)
  oval 1.5x0.4 smd: 2(0,-0.65) 3(0,-1.3) 4(0,-1.95) 5(4.695,-1.95) 6(4.695,-1.3) 7(4.695,-0.65) 8(4.695,0)
  silkscreen extent 1.17,-2.28 3.42,0.33
PQFP44 [mm]
  rect 1.75x0.5 smd: 1(0,0)
  oval 1.75x0.5 smd: 2(0,-0.8) 3(0,-1.6) 4(0,-2.4) 5(0,-3.2) 6(0,-4) 7(0,-4.8) 8(0,-5.6) 9(0,-6.4) 10(0,-7.2) 11(0,-8) 23(12.4,-8) 24(12.4,-7.2) 25(12.4,-6.4) 26(12.4,-5.6) 27(12.4,-4.8) 28(12.4,-4) 29(12.4,-3.2) 30(12.4,-2.4) 31(12.4,-1.6) 32(12.4,-0.8) 33(12.4,0)
  oval 0.5x1.75 smd: 12(2.2,-10) 13(3,-10) 14(3.8,-10) 15(4.6,-10) 16(5.4,-10) 17(6.2,-10) 18(7,-10) 19(7.8,-10) 20(8.6,-10) 21(9.4,-10) 22(10.2,-10) 34(10.2,2) 35(9.4,2) 36(8.6,2) 37(7.8,2) 38(7,2) 39(6.2,2) 40(5.4,2) 41(4.6,2) 42(3.8,2) 43(3,2) 44(2.2,2)
  silkscreen extent -0.82,-10.83 13.23,2.83
QFN-14 [mm]
  rect 0.7x0.25 smd: 1(0,-0.25) 2(0,-0.75) 3(0,-1.25) 4(0,-1.75) 7(2,-1.75) 8(2,-1.25) 9(2,-0.75) 10(2,-0.25) 13(1,-0.75) 14(1,-1.25)
  rect 0.25x0.7 smd: 5(0.75,-2) 6(1.25,-2) 11(1.25,0) 12(0.75,0)
  silkscreen extent -0.28,-2 2,0.46
SO-8 [mm] "Plastic Small Outline; 8 Leads; Body Width 3.9 mm"
  rect 0.55x2.2 smd: 1(-1.905,-2.6) 2(-0.635,-2.6) 3(0.635,-2.6) 4(1.905,-2.6) 5(1.905,2.6) 6(0.635,2.6) 7(-0.635,2.6) 8(-1.905,2.6)
  silkscreen extent -2.85,-2.72 2.5,1.1
SO-G3/C2.5 [mm] "SOT-23; 3 Leads; Body 3.0 x 2.6 mm, inc. leads (LxW max)"
  rect 0.9x0.95 smd: 1(-1.001,-2.164) 2(0.899,-2.164) 3(-0.051,0.336)
  silkscreen extent -2.13,-2.29 1.25,0.34
SOP16_P1.27_B10 [mm]
  rect 2.5x0.5 smd: 1(-2.489,2.489)
  oval 2.5x0.5 smd: 2(-2.489,1.219) 3(-2.489,-0.051) 4(-2.489,-1.321) 5(-2.489,-2.591) 6(-2.489,-3.861) 7(-2.489,-5.131) 8(-2.489,-6.401) 9(7.442,-6.426) 10(7.493,-5.08) 11(7.493,-3.81) 12(7.493,-2.54) 13(7.493,-1.27) 14(7.493,0) 15(7.493,1.27) 16(7.493,2.54)
  silkscreen extent -0.4,-7.04 5.43,3.12
SOT223 [mm]
  rect 1.1x1.55 smd: 1(-1.414,-2.74) 2(0.886,-2.74) 3(3.186,-2.74)
  rect 3.45x1.55 smd: 2(0.886,4.01)
  silkscreen extent -2.46,-4.19 4.24,2.48
TP_1MM [mm]
  round 1 smd: 1(0,0)
XH-03H [mm] "XH Serial,2.54mm pitch"
  rect 1.5x1.5 hole 0.9: 1(0,0)
  round 1.5 hole 0.9: 2(2.54,0) 3(5.08,0)
  silkscreen extent -2.54,-2.54 7.62,2.54
XH-04H [mm] "XH Serial,2.54mm pitch"
  rect 1.5x1.5 hole 0.9: 1(0,0)
  round 1.5 hole 0.9: 2(2.54,0) 3(5.08,0) 4(7.62,0)
  silkscreen extent -2.54,-2.54 10.16,2.54
XTAL-3216 [mil] "XTAL SMD type, body=1.5x3.2mm"
  rect 60x98.43 smd: 1(0,0) 2(130,0)
  silkscreen extent 35,-45 95,45

## Part data
3V3 -5V: library part TP_1mm
BT2: library part Battery, "Multicell Battery"
C1 C2 C3 C4 C5 C6 C7 C8 C9 C10 C12 C14 C15 C16 C17 C18 C19 C20 C21 C22 C23 C24 C25 C26 C28 C29: library part Cap2, "Capacitor"
C11 C13 C27: "Capacitor"
D1 D2 D5 D6 D17: library part "D Schottky", "Schottky Diode"
D3 D4: library part "D Tunnel1", "Tunnel Diode - RLC Model"
"G R T": "Header, 3-Pin"
P1: "Header, 4-Pin"
P2: "Header, 10-Pin, Dual row"
Q10 Q11: library part MOSFET-P
R1 R2 R3 R4 R5 R6 R7 R8 R9 R10 R11 R12 R13 R14 R15 R16 R17 R18 R19 R20 R21 R22 R23 R24 R25 R26 R27 R28 R29 R30 R31 R32 R33 R34 R35 R36 R37 R38 R39 R41 R42 R43 R44 R45 R46 R47 R48 R49 R50 R51 R52 R53 R54 R55 R67 R70 R71 R72 R73 R74 R75 R76 R77 R78 R79 R80 R81 R82 R83 R84 R85 R86 R87 R88 R89 R90 R91 R92 R93: library part Res3, "Resistor"
RxD TxD VCC5V VMNG_IN VMNG_OUT: library part COAX-F, "Coax-F Connector"
U1 U2 U3 U4 U5 U6 U8: library part TLP3107, "TLP3107"
U12: library part "Volt Reg", "Voltage Regulator"
U14: library part AP2004
U15: library part 24LC02, "IC"
U17: "Dual 4-Channel Analog Multiplexer/Demultiplexer"
U18: library part LM358D, "Dual Low-Power Operational Amplifier"
U19: "Dual Low-Power Operational Amplifier"
Y1: library part XTAL, "Crystal Oscillator"

## Free pads (board coordinates)
  round 6 hole 3: 7(801.837,208.432)

## Via types
v1: diameter 0.6, hole 0.3, Top Layer to Bottom Layer, 268 vias

## Nets (pads, with @x,y where several pads share a name; then routed paths per layer and width w, separated by ;. In a path a pad name is that pad's centre, name@x,y a point inside that pad or via, vN(x,y) a via of type N, cw(c..) or ccw(c..) an arc to the next point about the centre after c; other vN are vias at no path point)
BV1: R24.1 R28.2 U10.9 | length 52.8
  Top Layer w0.3: R28.2@798.855,223.837 R24.1@798.855,225.921 ; v1(820.913,192.339) U10.9@822.833,192.339
  Bottom Layer w0.3: v1(798.855,224.866) 798.855,217.322 805.993,210.185 805.993,198.831 807.085,197.739 816.102,197.739 817.347,196.494 817.347,192.735 817.743,192.339 v1(820.913,192.339)
BV2: R25.1 R29.2 U10.8 | length 50.5
  Top Layer w0.3: R29.2@800.913,223.837 R25.1@800.913,225.947 ; v1(820.062,193.139) U10.8@822.833,193.139
  Bottom Layer w0.3: v1(800.913,224.815) 800.913,216.205 806.577,210.541 806.577,199.254 807.542,198.289 816.365,198.289 817.982,196.672 817.982,193.853 818.695,193.139 v1(820.062,193.139)
BV3: R30.1 R34.2 U10.7 | length 48.7
  Top Layer w0.3: R34.2@802.919,223.837 R30.1@802.919,225.947 ; v1(820.969,193.939) U10.7@822.833,193.939
  Bottom Layer w0.3: v1(802.919,224.866) 802.919,215.011 807.127,210.803 807.127,199.78 808.05,198.857 816.737,198.857 818.617,196.977 818.617,194.183 818.86,193.939 v1(820.969,193.939)
BV4: R31.1 R35.2 U10.5 | length 45.8
  Top Layer w0.3: R35.2@804.926,223.811 R31.1@804.926,225.921 ; v1(820.994,195.539) U10.5@822.833,195.539
  Bottom Layer w0.3: v1(804.926,224.866) 804.926,213.782 807.72,210.988 807.72,200.33 808.643,199.407 817.203,199.407 819.252,197.358 819.252,195.859 819.572,195.539 v1(820.994,195.539)
BV5: R54.1 R55.2 U10.4 | length 44.8
  Top Layer w0.3: R55.2@806.958,223.786 R54.1@806.958,225.896 ; v1(820.229,196.339) U10.4@822.833,196.339
  Bottom Layer w0.3: v1(806.958,224.892) 806.958,216.078 805.713,214.833 805.713,213.995 808.27,211.438 808.27,200.948 809.219,200 817.702,200 819.912,197.79 819.912,196.656 v1(820.229,196.339)
CH_CS0: U17.10
CH_CS1: U17.9
CTRL_0: R70.2 R79.1 U9.4 | length 66.6
  Top Layer w0.3: R70.2@794.588,234.1 795.934,232.754 v1(795.934,230.708) ; v1(811.327,185.649) U9.4@811.327,187.614
  Mid-Layer 1 w0.3: v1(795.934,230.708) 795.934,221.92 797.408,220.447 805.459,220.447 805.951,219.955 805.951,193.387 808.152,191.186 810.844,191.186 811.327,190.703 v1(811.327,185.649)
  Bottom Layer w0.3: R79.1@809.676,187.364 809.676,186.284 810.311,185.649 v1(811.327,185.649)
CTRL_1: R71.2 R80.1 U9.5 | length 72.7
  Top Layer w0.3: v1(797.738,230.759) 796.95,231.826 798.043,232.918 804.938,232.918 R71.2@806.069,234.049 ; v1(812.597,185.674) U9.5@812.597,187.614
  Mid-Layer 1 w0.3: v1(797.738,230.759) 797.738,221.742 798.474,221.005 805.79,221.005 806.501,220.294 806.501,193.7 808.457,191.745 811.555,191.745 812.597,190.703 v1(812.597,185.674)
  Bottom Layer w0.3: R80.1@811.682,187.389 811.682,186.588 v1(812.597,185.674)
CTRL_2: R72.2 R81.1 U9.6 | length 63.8
  Top Layer w0.3: v1(807.288,230.48) 807.288,231.632 807.974,232.318 814.384,232.318 R72.2@815.899,233.832 ; v1(813.867,185.674) U9.6@813.867,187.614
  Mid-Layer 1 w0.3: v1(807.288,230.48) 807.288,229.321 808.152,228.457 808.152,194.412 810.057,192.507 813.156,192.507 813.867,191.795 v1(813.867,185.674)
  Bottom Layer w0.3: R81.1@813.689,187.415 813.689,185.852 v1(813.867,185.674)
CTRL_3: R73.2 R82.1 U9.7 | length 79.7
  Top Layer w0.3: v1(808.025,230.937) 808.025,231.388 808.355,231.718 820.109,231.718 821.792,233.401 829.931,233.401 R73.2@831.494,234.964 ; v1(815.137,185.674) U9.7@815.137,187.614
  Mid-Layer 1 w0.3: v1(808.025,230.937) 808.025,229.362 808.719,228.667 808.719,194.835 810.362,193.192 814.095,193.192 815.137,192.151 v1(815.137,185.674)
  Bottom Layer w0.3: v1(815.137,185.674) 815.721,186.258 R82.1@815.721,187.415
CTRL_4: R74.2 R83.1 U9.9 | length 59.1
  Top Layer w0.3: v1(816.432,195.961) U9.9@816.432,197.545
  Mid-Layer 1 w0.3: v1(808.736,230.403) 808.736,229.489 809.269,228.956 809.269,195.199 810.59,193.878 814.349,193.878 v1(816.432,195.961)
  Bottom Layer w0.3: R74.2@800.583,234.151 800.583,232.893 800.938,232.537 808.152,232.537 808.736,231.953 v1(808.736,230.403) ; R83.1@816.229,193.89 816.229,195.047 816.432,195.25 v1(816.432,195.961)
CTRL_5: R75.2 R84.1 U9.10 | length 51.1
  Top Layer w0.3: v1(815.086,195.986) U9.10@815.086,197.596
  Mid-Layer 1 w0.3: v1(809.447,230.937) 809.447,229.667 809.828,229.286 809.828,195.529 810.844,194.513 813.613,194.513 v1(815.086,195.986)
  Bottom Layer w0.3: v1(809.447,230.937) 809.447,232.664 809.727,232.943 811.428,232.943 811.759,233.274 R75.2@811.759,234.176 ; R84.1@814.197,193.89 814.197,194.742 815.086,195.631 v1(815.086,195.986)
CTRL_6: R76.2 R85.1 U9.11 | length 57.5
  Top Layer w0.3: v1(813.816,196.012) U9.11@813.816,197.596
  Mid-Layer 1 w0.3: v1(810.209,230.353) 810.209,229.794 810.387,229.616 810.387,196.479 810.412,196.453 810.412,195.986 811.2,195.199 813.003,195.199 v1(813.816,196.012)
  Bottom Layer w0.3: v1(810.209,230.353) 810.209,231.851 810.539,232.181 821.182,232.181 821.817,232.816 R76.2@821.817,234.075 ; R85.1@812.19,193.941 812.19,194.31 v1@813.816,195.936
CTRL_7: R77.2 R86.1 U9.12 | length 71.2
  Top Layer w0.3: v1(812.546,195.986) U9.12@812.546,197.596
  Mid-Layer 1 w0.3: v1(810.946,230.835) 810.946,196.698 811.657,195.986 v1(812.546,195.986)
  Bottom Layer w0.3: R86.1@810.184,193.966 810.221,193.966 812.241,195.986 v1(812.546,195.986) ; v1(810.946,230.835) 810.946,231.445 811.082,231.581 836.838,231.581 837.489,232.232 R77.2@837.489,235.065
CTRL_BAK: R27.2 U10.33 | length 42.6
  Top Layer w0.3: U10.33@834.649,198.739 v1(835.828,198.739) ; v1(840.347,234.811) R27.2@842.137,234.811
  Mid-Layer 1 w0.3: v1(835.828,198.739) 835.828,211.572 836.549,212.293 839.47,212.293 840.347,213.17 v1(840.347,234.811)
CURRSEN: U10.10 U18.7 | length 41.2
  Top Layer w0.3: U18.7@811.413,209.986 811.413,207.732 810.946,207.264 807.745,207.264 803.977,203.496 803.977,193.415 805.853,191.539 U10.10@822.833,191.539
DIO_SCL: R9.2 U9.14 U10.2 | length 20.6
  Top Layer w0.3: R9.2@811.315,200.644 810.006,199.335 810.006,195.834 810.844,194.996 817.601,194.996 818.109,195.504 818.109,196.926 819.122,197.939 U10.2@822.833,197.939
DIO_SDA: R8.2 U9.15 U10.3 | length 22.1
  Top Layer w0.3: R8.2@809.078,200.619 808.736,200.277 808.736,195.428 809.879,194.285 818.134,194.285 818.769,194.92 818.769,196.647 819.261,197.139 U10.3@822.833,197.139
FLASH_CTRL: R51.2 U10.32 | length 41.1
  Top Layer w0.3: U10.32@834.649,197.939 v1(836.244,197.942)
  Mid-Layer 1 w0.3: v1(836.244,197.942) 838.403,200.101 838.403,210.82 839.038,211.455 840.029,211.455 840.969,212.395 840.969,228.854 841.781,229.667 v1(845.414,229.667)
  Bottom Layer w0.5: R51.2@844.105,229.667 v1(845.414,229.667)
FLASH_OUT: Q11.3 R53.1 S.1 | length 15.1
  Bottom Layer w0.5: Q11.3@842.797,238.969 845.674,238.969 R53.1@846.125,238.518 846.125,240.843 847.979,242.697 S.1@854.634,242.697
GND: "G R T.3" B1-.1 B2-.1 B3-.1 B4-.1 B5-.1 BT2.2 C1.2 C2.2 C4.2 C5.2 C6.2 C7.2 C8.2 C9.2 C10.2 C11.2 C12.2 C13.2 C14.2 C16.2 C17.2 C18.2 C19.2 C20.2 C21.2 C22.2 C25.2 C26.2 C27.2 C28.2 C29.2 D5.1 D6.1 G.1 GND1.1 GND.1 P1.3 P2.6 P2.19 P2.20 Q1.2 Q2.2 Q3.2 Q4.2 Q5.2 Q6.2 Q7.2 Q8.2 Q9.2 R15.2 R28.1 R29.1 R32.2 R34.1 R35.1 R39.2 R41.2 R42.1 R45.1 R50.1 R52.1 R53.2 R55.1 R78.2 R87.2 R88.2 R89.2 R90.2 R91.2 R92.2 R93.2 S-.1 U9.1 U9.2 U9.3 U9.8 U10.16 U12.1 U13.1 U13.3 U13.6 U14.1 U14.2 U14.11 U14.13 U15.1 U15.2 U15.3 U15.4 U15.7 U17.6 U17.8 U18.6 U22.4 | length 165.5
  Top Layer w0.25: U14.13@851.445,218.913 U14.2@851.445,219.913 ; U14.11@852.195,218.663 852.963,218.663 853.757,217.869 R15.2@854.304,217.869
  Top Layer w0.3: C16.2@789.483,209.868 v1(788.098,209.868) 788.098,213.092 788.734,213.729 C19.2@789.483,213.729 ; P1.3@790.524,233.299 796.773,227.051 v1(796.976,227.051) ; R39.2@792.709,202.629 792.951,202.387 792.951,199.681 793.623,199.009 796.519,199.009 v1(796.996,199.486) ; R78.2@796.62,234.1 Q1.2@798.264,234.1 ; C20.2@797.497,211.961 R45.1@797.497,214.071 ; R28.1@798.855,222.137 R55.1@806.856,222.137 ; U9.1@807.517,186.487 U9.1@807.517,187.614 ; R87.2@808.152,234.049 Q2.2@809.824,234.049 ; C13.2@808.507,211.822 810.223,211.822 810.763,211.282 U18.6@810.763,209.986 ; R42.1@808.648,217.272 808.648,217.996 810.031,219.38 813.714,219.38 814.209,218.885 R41.2@814.209,217.246 ; v1@808.787,185.887 v1(808.787,185.938) ; C11.2@813.867,211.848 814.693,211.848 v1(816.331,210.21) U22.4@821.605,210.21 ; R88.2@817.905,233.832 Q3.2@819.68,233.832 ; R89.2@833.577,235.014 835.326,235.014 836.762,233.578 843.89,233.578 844.22,233.909 R32.2@844.22,234.837 Q9.2@845.994,234.837 ; BT2.2@834.779,217.907 834.779,218.727 834.974,218.923 C4.2@836.568,218.923 ; U15.3@847.953,201.574 850.703,201.574 C2.2@851.814,200.883
  Top Layer w0.5: v1(807.364,213.944) 808.279,213.944 808.507,213.716 C13.2@808.507,211.822 ; U9.1@807.517,186.487 807.517,186.385 808.015,185.887 809.939,185.887 810.057,186.004 U9.3@810.057,187.614 ; v1(808.787,185.938) U9.2@808.787,187.614 ; U17.6@810.925,221.92 813.003,221.92 813.994,222.91 813.994,229.565 C14.2@813.296,230.263 ; C18.2@827.62,186.36 827.649,186.389 U10.16@827.649,188.739 ; U13.3@834.482,222.92 U13.6@839.682,222.92 ; U13.1@834.482,225.46 836.539,225.46 836.568,225.431 C4.2@836.568,218.923 ; U15.7@842.753,200.304 U15.2@847.953,200.304 ; C9.2@846.33,197.053 846.33,198.513 846.852,199.034 U15.1@847.953,199.034 U15.4@847.953,202.844
  Top Layer w1: C2.2@851.814,200.883 854.741,200.883 854.743,201.465 854.743,200.841
  Bottom Layer w0.3: Q5.2@796.676,234.089 798.489,234.089 R90.2@798.551,234.151 ; Q6.2@808.106,233.911 809.512,233.911 R91.2@809.752,234.151 ; Q7.2@817.911,233.733 819.469,233.733 R92.2@819.76,234.024 ; R50.1@829.945,212.002 832.005,212.002 D5.1@832.465,211.543 ; Q8.2@833.684,234.876 835.243,234.876 R93.2@835.406,235.04
  Bottom Layer w0.5: C17.2@797.058,225.476 C21.2@797.058,228.727 ; D6.1@844.564,232.085 844.564,234.11 R52.1@844.155,234.518 844.155,234.555 846.125,236.525 R53.2@846.125,236.818 853.555,236.818 G.1@854.634,237.896
  other v1: 833.857,184.175 834.873,184.175 835.889,184.175 836.905,184.175 833.857,185.191 834.873,185.191 835.889,185.191 836.905,185.191 833.857,186.207 834.873,186.207 835.889,186.207 836.905,186.207 805.383,187.198 806.399,187.198 818.159,188.189 819.175,188.189 820.191,188.189 804.367,188.214 805.383,188.214 806.399,188.214 818.159,189.205 819.175,189.205 820.191,189.205 804.367,189.23 805.383,189.23 806.399,189.23 826.745,191.999 827.761,191.999 828.777,191.999 829.793,191.999 826.745,193.015 827.761,193.015 828.777,193.015 829.793,193.015 826.745,194.031 827.761,194.031 828.777,194.031 829.793,194.031 826.77,196.418 827.786,196.418 828.802,196.418 829.818,196.418 826.77,197.434 827.786,197.434 828.802,197.434 829.818,197.434 856.513,197.79 857.529,197.79 849.579,198.374 826.77,198.45 827.786,198.45 828.802,198.45 829.818,198.45 856.513,198.806 857.529,198.806 849.579,199.39 805.053,200.203 849.579,200.406 792.951,201.473 849.605,201.574 861.263,202.438 849.63,202.616 861.263,203.454 861.263,204.47 862.279,204.47 842.061,205.41 843.077,205.41 844.093,205.41 861.263,205.486 862.279,205.486 842.061,206.426 843.077,206.426 844.093,206.426 842.061,207.442 843.077,207.442 844.093,207.442 842.061,208.458 843.077,208.458 844.093,208.458 831.164,212.002 795.426,212.242 794.233,212.268 797.497,212.827 798.83,212.827 812.216,219.38 852.119,220.98 852.881,220.98 857.326,221.564 858.342,221.564 859.358,221.564 852.119,221.742 852.881,221.742 812.47,221.92 854.354,222.529 855.37,222.529 857.326,222.58 858.342,222.58 859.358,222.58 822.528,223.545 823.544,223.545 854.354,223.545 855.37,223.545 857.326,223.596 858.342,223.596 859.358,223.596 837.286,223.723 822.528,224.561 823.544,224.561 854.354,224.561 855.37,224.561 857.326,224.612 858.342,224.612 859.358,224.612 837.286,224.739 822.528,225.577 823.544,225.577 854.354,225.577 855.37,225.577 857.377,225.628 858.393,225.628 859.409,225.628 837.286,225.755 822.528,226.593 823.544,226.593 854.405,226.593 855.421,226.593 857.377,226.644 858.393,226.644 859.409,226.644 836.27,226.771 837.286,226.771 838.302,226.771 854.405,227.609 855.421,227.609 857.377,227.66 858.393,227.66 859.409,227.66 854.405,228.625 855.421,228.625 817.423,229.311 812.165,230.632 818.82,233.807 809.041,234.01 797.484,234.1 834.568,235.001
IIC0_SCL: R38.1 U10.30 U15.6 U22.6 | length 33.7
  Top Layer w0.3: U22.6@826.805,211.48 830.275,211.48 832.764,208.991 835.025,208.991 835.762,208.255 835.762,203.81 836.295,203.276 v1(839.241,203.276) 839.892,202.625 R38.1@839.892,201.256 840.701,201.256 841.019,201.574 U15.6@842.772,201.574 ; U10.30@834.649,196.339 v1(836.546,196.339)
  Mid-Layer 1 w0.3: v1(836.546,196.339) 839.241,199.034 v1(839.241,203.276)